# Altium PCB FPGA_interface_ver2.PcbDoc (part 2 of 2)
Units mil, origin at the board's own origin, x right, y up, seen from the top; angles counter-clockwise.
Board outline 4407 x 9659 mil, 4 copper layers (Top Layer, Ground Plane Top, Ground Plane Bottom, Bottom Layer); 18 components, 181 nets, 968 pads, 2724 vias.
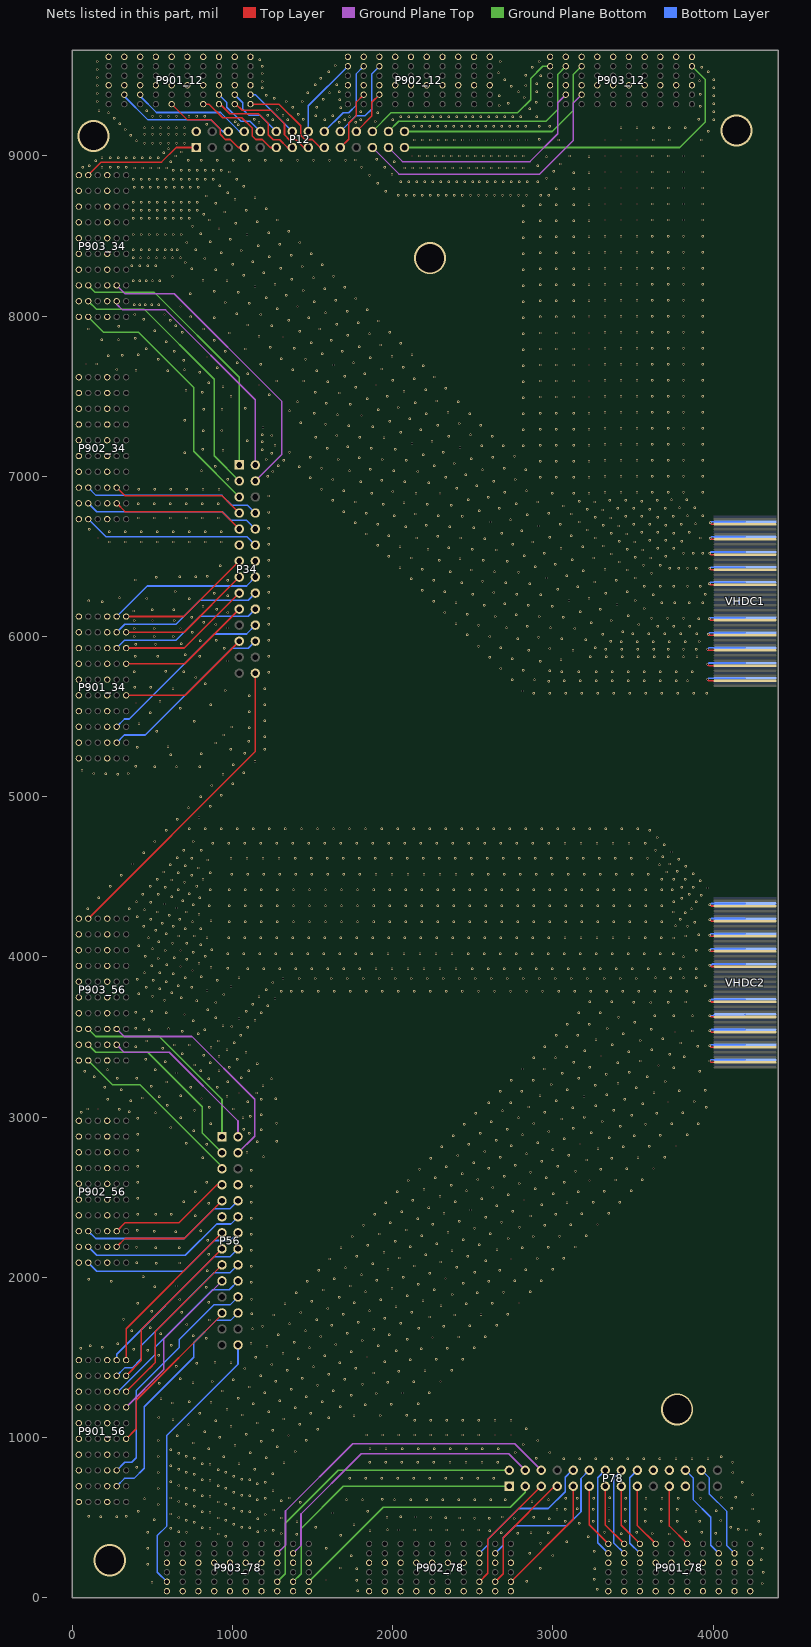
[diagram p4: the nets of this part, all layers, seen from the top]

## Via types
v1: diameter 15, hole 10, Top Layer to Bottom Layer, 2719 vias
v2: diameter 200, hole 177, Top Layer to Bottom Layer, 5 vias

## Nets (pads, with @x,y where several pads share a name; then routed paths per layer and width w, separated by ;. In a path a pad name is that pad's centre, name@x,y a point inside that pad or via, vN(x,y) a via of type N, cw(c..) or ccw(c..) an arc to the next point about the centre after c; other vN are vias at no path point) (continued)
GND: P12.15 P34.6 P34.21 P56.6 P56.18 P78.12 P78.24 P78.25 P901_12.BG1 P901_12.BG2 P901_12.BG3 P901_12.BG4 P901_12.BG5 P901_12.BG6 P901_12.BG7 P901_12.BG8 P901_12.BG9 P901_12.BG10 P901_12.DG1 P901_12.DG2 P901_12.DG3 P901_12.DG4 P901_12.DG5 P901_12.DG6 P901_12.DG7 P901_12.DG8 P901_12.DG9 P901_12.DG10 P901_34.BG1 P901_34.BG2 P901_34.BG3 P901_34.BG4 P901_34.BG5 P901_34.BG6 P901_34.BG7 P901_34.BG8 P901_34.BG9 P901_34.BG10 P901_34.DG1 P901_34.DG2 P901_34.DG3 P901_34.DG4 P901_34.DG5 P901_34.DG6 P901_34.DG7 P901_34.DG8 P901_34.DG9 P901_34.DG10 P901_56.BG1 P901_56.BG2 P901_56.BG3 P901_56.BG4 P901_56.BG5 P901_56.BG6 P901_56.BG7 P901_56.BG8 P901_56.BG9 P901_56.BG10 P901_56.DG1 P901_56.DG2 P901_56.DG3 P901_56.DG4 P901_56.DG5 P901_56.DG6 P901_56.DG7 P901_56.DG8 P901_56.DG9 P901_56.DG10 P901_78.BG1 P901_78.BG2 P901_78.BG3 P901_78.BG4 P901_78.BG5 P901_78.BG6 P901_78.BG7 P901_78.BG8 P901_78.BG9 P901_78.BG10 P901_78.DG1 P901_78.DG2 P901_78.DG3 P901_78.DG4 P901_78.DG5 P901_78.DG6 P901_78.DG7 P901_78.DG8 P901_78.DG9 P901_78.DG10 P902_12.BG1 P902_12.BG2 P902_12.BG3 P902_12.BG4 P902_12.BG5 P902_12.BG6 P902_12.BG7 P902_12.BG8 P902_12.BG9 P902_12.BG10 P902_12.DG1 P902_12.DG2 P902_12.DG3 P902_12.DG4 P902_12.DG5 P902_12.DG6 P902_12.DG7 P902_12.DG8 P902_12.DG9 P902_12.DG10 P902_34.BG1 P902_34.BG2 P902_34.BG3 P902_34.BG4 P902_34.BG5 P902_34.BG6 P902_34.BG7 P902_34.BG8 P902_34.BG9 P902_34.BG10 P902_34.DG1 P902_34.DG2 P902_34.DG3 P902_34.DG4 P902_34.DG5 P902_34.DG6 P902_34.DG7 P902_34.DG8 P902_34.DG9 P902_34.DG10 P902_56.BG1 P902_56.BG2 P902_56.BG3 P902_56.BG4 P902_56.BG5 P902_56.BG6 P902_56.BG7 P902_56.BG8 P902_56.BG9 P902_56.BG10 P902_56.DG1 P902_56.DG2 P902_56.DG3 P902_56.DG4 P902_56.DG5 P902_56.DG6 P902_56.DG7 P902_56.DG8 P902_56.DG9 P902_56.DG10 P902_78.BG1 P902_78.BG2 P902_78.BG3 P902_78.BG4 P902_78.BG5 P902_78.BG6 P902_78.BG7 P902_78.BG8 P902_78.BG9 P902_78.BG10 P902_78.DG1 P902_78.DG2 P902_78.DG3 P902_78.DG4 P902_78.DG5 P902_78.DG6 P902_78.DG7 P902_78.DG8 P902_78.DG9 P902_78.DG10 P903_12.BG1 P903_12.BG2 P903_12.BG3 P903_12.BG4 P903_12.BG5 P903_12.BG6 P903_12.BG7 P903_12.BG8 P903_12.BG9 P903_12.BG10 P903_12.DG1 P903_12.DG2 P903_12.DG3 P903_12.DG4 P903_12.DG5 P903_12.DG6 P903_12.DG7 P903_12.DG8 P903_12.DG9 P903_12.DG10 P903_34.BG1 P903_34.BG2 P903_34.BG3 P903_34.BG4 P903_34.BG5 P903_34.BG6 P903_34.BG7 P903_34.BG8 P903_34.BG9 P903_34.BG10 P903_34.DG1 P903_34.DG2 P903_34.DG3 P903_34.DG4 P903_34.DG5 P903_34.DG6 P903_34.DG7 P903_34.DG8 P903_34.DG9 P903_34.DG10 P903_56.BG1 P903_56.BG2 P903_56.BG3 P903_56.BG4 P903_56.BG5 P903_56.BG6 P903_56.BG7 P903_56.BG8 P903_56.BG9 P903_56.BG10 P903_56.DG1 P903_56.DG2 P903_56.DG3 P903_56.DG4 P903_56.DG5 P903_56.DG6 P903_56.DG7 P903_56.DG8 P903_56.DG9 P903_56.DG10 P903_78.BG1 P903_78.BG2 P903_78.BG3 P903_78.BG4 P903_78.BG5 P903_78.BG6 P903_78.BG7 P903_78.BG8 P903_78.BG9 P903_78.BG10 P903_78.DG1 P903_78.DG2 P903_78.DG3 P903_78.DG4 P903_78.DG5 P903_78.DG6 P903_78.DG7 P903_78.DG8 P903_78.DG9 P903_78.DG10 VHDC1.A2 VHDC1.A5 VHDC1.A8 VHDC1.A11 VHDC1.A14 VHDC1.A21 VHDC1.A24 VHDC1.A27 VHDC1.A30 VHDC1.A33 VHDC1.B2 VHDC1.B5 VHDC1.B8 VHDC1.B11 VHDC1.B14 VHDC1.B21 VHDC1.B24 VHDC1.B27 VHDC1.B30 VHDC1.B33 VHDC2.A2 VHDC2.A5 VHDC2.A8 VHDC2.A11 VHDC2.A14 VHDC2.A21 VHDC2.A24 VHDC2.A27 VHDC2.A30 VHDC2.A33 VHDC2.B2 VHDC2.B5 VHDC2.B8 VHDC2.B11 VHDC2.B14 VHDC2.B21 VHDC2.B24 VHDC2.B27 VHDC2.B30 VHDC2.B33 | length 9062.5
  Top Layer w10: v1(3965,5732) 3972.88,5724.12 VHDC1.A33@4200,5724.12 ; v1(3965,5827) 3973.39,5818.61 VHDC1.A30@4200,5818.61 ; v1(3965,5920) 3971.9,5913.1 VHDC1.A27@4200,5913.1 ; v1(3969,6015) 3976.41,6007.59 VHDC1.A24@4200,6007.59 ; v1(3975,6110) 3982.92,6102.08 VHDC1.A21@4200,6102.08 ; v1(3976,6329) 3982.45,6322.55 VHDC1.A14@4200,6322.55 ; v1(3978,6520) 3986.47,6511.53 VHDC1.A8@4200,6511.53 ; v1(3979,6425) 3986.96,6417.04 VHDC1.A11@4200,6417.04 ; v1(3980,3350) 3988.39,3341.61 VHDC2.A33@4200,3341.61 ; v1(3980,3444) 3987.9,3436.1 VHDC2.A30@4200,3436.1 ; v1(3980,3538) 3987.41,3530.59 VHDC2.A27@4200,3530.59 ; v1(3980,3633) 3987.92,3625.08 VHDC2.A24@4200,3625.08 ; v1(3980,3726) 3987.92,3718.08 VHDC2.A21@4200,3718.08 ; v1(3980,3948) 3987.96,3940.04 VHDC2.A14@4200,3940.04 ; v1(3980,4042) 3987.47,4034.53 VHDC2.A11@4200,4034.53 ; v1(3980,4136) 3986.98,4129.02 VHDC2.A8@4200,4129.02 ; v1(3980,4231) 3987.5,4223.5 VHDC2.A5@4200,4223.5 ; v1(3980,4325) 3987.5,4317.5 VHDC2.A2@4200,4317.5 ; v1(3981,6614) 3988.98,6606.02 VHDC1.A5@4200,6606.02 ; v1(3981,6710) 3990.5,6700.5 VHDC1.A2@4200,6700.5
  Bottom Layer w10: v1(3965,5732) 3972.87,5739.87 VHDC1.B33@4200,5739.87 ; v1(3965,5827) 3972.36,5834.36 VHDC1.B30@4200,5834.36 ; v1(3965,5920) 3973.85,5928.85 VHDC1.B27@4200,5928.85 ; v1(3969,6015) 3977.34,6023.34 VHDC1.B24@4200,6023.34 ; v1(3975,6110) 3982.83,6117.83 VHDC1.B21@4200,6117.83 ; v1(3976,6329) 3985.3,6338.3 VHDC1.B14@4200,6338.3 ; v1(3978,6520) 3985.28,6527.28 VHDC1.B8@4200,6527.28 ; v1(3979,6425) 3986.79,6432.79 VHDC1.B11@4200,6432.79 ; v1(3980,3350) 3987.36,3357.36 VHDC2.B33@4200,3357.36 ; v1(3980,3444) 3987.85,3451.85 VHDC2.B30@4200,3451.85 ; v1(3980,3538) 3988.34,3546.34 VHDC2.B27@4200,3546.34 ; v1(3980,3633) 4192.17,3633 VHDC2.B24@4200,3640.83 ; v1(3980,3726) 3987.83,3733.83 VHDC2.B21@4200,3733.83 ; v1(3980,3948) 3987.49,3948 3995.28,3955.79 VHDC2.B14@4200,3955.79 ; v1(3980,4042) 3988.28,4050.28 VHDC2.B11@4200,4050.28 ; v1(3980,4136) 3988.76,4144.76 VHDC2.B8@4200,4144.76 ; v1(3980,4231) 3988.25,4239.25 VHDC2.B5@4200,4239.25 ; v1(3980,4325) 3988.25,4333.25 VHDC2.B2@4200,4333.25 ; v1(3981,6614) 3988.76,6621.76 VHDC1.B5@4200,6621.76 ; v1(3981,6710) 3987.25,6716.25 VHDC1.B2@4200,6716.25
  other v1: 1782,42 3276,52 4307,88 497,95 2837,102 1775,109 1583,110 3259,115 4312,158 3262,179 1776,181 2921,182 1672,185 471,207 4300,235 1741,261 2998,263 2856,277 3258,289 471,307 1585,309 4306,309 2922,339 3087,348 3220,380 958,383 1676,388 4295,395 1401,396 910,397 3725,397 3427,398 1303,400 3620,400 2779,402 4016,402 2676,405 2863,405 2970,406 471,407 712,408 3322,409 3522,409 3928,409 664,410 3829,410 1158,411 1858,417 2605,417 1204,419 1255,420 2036,422 2136,422 2236,422 2336,422 2436,422 2536,422 4208,422 1967,423 4157,426 615,433 859,433 811,436 1106,436 4110,438 1057,439 1519,439 1758,454 1007,457 3165,465 761,470 1402,474 3077,476 3251,476 3451,476 3577,476 3677,476 3777,476 3917,476 4284,476 3350,480 4047,481 711,482 958,483 511,485 1158,491 2977,493 2758,494 2603,495 2510,496 910,497 1303,497 2417,497 2331,499 665,500 2238,500 1964,502 2880,502 2142,503 2684,503 178,504 2049,504 276,505 102,507 336,507 1204,519 615,522 1624,528 859,533 811,536 1106,536 1845,538 411,539 1057,539 3893,540 4020,541 1256,547 3025,552 3077,552 3251,552 3451,552 3577,552 3677,552 3777,552 4248,553 3152,554 3350,556 1007,557 4117,558 761,570 537,581 711,582 958,583 1422,595 910,597 2869,598 665,600 1304,605 1155,611 2972,611 1711,612 1811,612 2011,612 2111,612 2211,612 2311,612 2411,612 2511,612 2611,612 2702,612 1935,615 450,616 1204,619 3081,620 3255,620 3455,620 3581,620 3681,620 3781,620 3921,620 3152,621 615,622 1353,622 3354,624 4051,625 4142,627 859,633 811,636 1106,636 1057,639 4246,643 1007,657 1252,668 761,670 537,681 711,682 958,683 910,697 665,700 1155,711 1204,719 4181,720 615,722 859,733 811,736 1106,736 1057,739 1731,745 1831,745 1931,745 2031,745 2131,745 2231,745 2331,745 2431,745 2531,745 2631,745 1007,757 761,770 1251,772 537,781 4123,781 711,782 958,783 910,797 665,800 1139,802 401,813 615,822 859,833 1040,835 811,836 1321,842 1857,844 1957,844 2057,844 2157,844 2257,844 2357,844 2457,844 2557,844 2655,845 4121,846 3068,867 3168,867 3268,867 3368,867 3468,867 3568,867 3668,867 3768,867 3868,867 3968,867 2896,869 761,870 1209,872 4050,879 945,880 537,881 711,882 665,900 1110,905 2765,906 2979,906 1391,912 615,922 850,930 1858,930 1958,930 2058,930 2158,930 2258,930 2358,930 2458,930 2558,930 2658,930 1279,942 1015,950 2815,956 755,965 1180,975 537,981 2904,981 1461,982 920,1000 655,1010 1349,1012 1838,1015 1938,1015 2038,1015 2138,1015 2238,1015 2338,1015 2438,1015 2538,1015 2638,1015 2738,1015 1085,1020 825,1035 1250,1045 1531,1052 2834,1054 990,1070 725,1080 1419,1082 1155,1090 895,1105 2138,1107 2238,1107 2338,1107 2438,1107 2538,1107 2638,1107 2738,1107 628,1110 1320,1115 1601,1122 539,1124 1758,1134 1921,1137 2088,1139 1060,1140 795,1150 1489,1152 1225,1160 965,1175 1390,1185 1671,1192 1828,1204 1991,1207 2158,1209 1130,1210 624,1215 865,1220 1559,1222 730,1223 1295,1230 553,1242 1035,1245 1460,1255 1741,1262 1898,1274 2061,1277 2228,1279 1200,1280 935,1290 1629,1292 1365,1300 1105,1315 1530,1325 1811,1332 543,1337 753,1340 1968,1344 2131,1347 874,1349 2298,1349 1270,1350 1005,1360 1699,1362 673,1365 1435,1370 1175,1385 1600,1395 1881,1402 2038,1414 2201,1417 2368,1419 1340,1420 1075,1430 1769,1432 1505,1440 648,1443 1245,1455 777,1463 990,1465 1670,1465 890,1469 1951,1472 2108,1484 2271,1487 2438,1489 1410,1490 1145,1500 1839,1502 1575,1510 539,1512 1315,1525 1740,1535 2021,1542 471,1545 382,1550 2178,1554 51,1556 2341,1557 2508,1559 1480,1560 187,1562 1215,1570 112,1571 1909,1572 618,1575 1645,1580 282,1584 1115,1587 1385,1595 1810,1605 2091,1612 835,1618 2248,1624 2411,1627 2578,1629 1550,1630 755,1634 1285,1640 1979,1642 551,1648 1715,1650 1455,1665 371,1666 1880,1675 1124,1679 2161,1682 487,1685 1187,1694 2318,1694 2481,1697 2648,1699 1620,1700 714,1705 1355,1710 2049,1712 1785,1720 854,1733 1525,1735 319,1738 1950,1745 2231,1752 1257,1764 2388,1764 2551,1767 2718,1769 1690,1770 1120,1772 1425,1780 683,1782 2119,1782 495,1788 1855,1790 1595,1805 2020,1815 2301,1822 1327,1834 2458,1834 2621,1837 408,1838 2788,1839 1760,1840 850,1844 1495,1850 2189,1852 1925,1860 669,1861 1118,1862 1665,1875 2090,1885 2371,1892 1397,1904 2528,1904 2691,1907 2858,1909 1830,1910 1565,1920 2259,1922 1995,1930 835,1938 515,1941 650,1945 1735,1945 2160,1955 2441,1962 1116,1969 1467,1974 2598,1974 243,1975 2761,1977 2928,1979 1900,1980 101,1988 1635,1990 2329,1992 2065,2000 441,2002 1805,2015 2230,2025 2511,2032 842,2041 1537,2044 2668,2044 2831,2047 2998,2049 1970,2050 1705,2060 2399,2062 1116,2069 2135,2070 1875,2085 524,2088 671,2089 401,2091 2300,2095 2581,2102 1607,2114 2738,2114 2901,2117 3068,2119 2040,2120 1775,2130 2469,2132 2205,2140 850,2144 1945,2155 2370,2165 1116,2169 2651,2172 667,2183 521,2184 1677,2184 2808,2184 2971,2187 400,2188 3138,2189 2110,2190 1845,2200 2539,2202 2275,2210 2015,2225 845,2232 2440,2235 2721,2242 1747,2254 2878,2254 3041,2257 3208,2259 2180,2260 1116,2269 1915,2270 2609,2272 2345,2280 644,2283 510,2286 800,2290 404,2293 2085,2295 2510,2305 2791,2312 1817,2324 2948,2324 3111,2327 3278,2329 2250,2330 1985,2340 2679,2342 2415,2350 2155,2365 1116,2369 2580,2375 2861,2382 768,2385 409,2392 520,2394 616,2394 1887,2394 3018,2394 3181,2397 3348,2399 2320,2400 2055,2410 2749,2412 2485,2420 2225,2435 2650,2445 2931,2452 851,2463 1957,2464 3088,2464 3251,2467 1116,2469 3418,2469 2390,2470 695,2472 2125,2480 2819,2482 2555,2490 409,2492 2295,2505 2720,2515 3001,2522 768,2534 2027,2534 3158,2534 3321,2537 3488,2539 2460,2540 2195,2550 2889,2552 2625,2560 1116,2569 2365,2575 2790,2585 409,2592 3071,2592 839,2594 2097,2604 3228,2604 3391,2607 3558,2609 2530,2610 2265,2620 2959,2622 2695,2630 2435,2645 2860,2655 3141,2662 1116,2669 2167,2674 3298,2674 3461,2677 3628,2679 2600,2680 2335,2690 409,2692 3029,2692 2765,2700 2505,2715 2930,2725 3211,2732 2237,2744 3368,2744 813,2746 3531,2747 3698,2749 2670,2750 1193,2752 2405,2760 3099,2762 2835,2770 1090,2780 2575,2785 409,2792 3000,2795 3281,2802 2307,2814 3438,2814 3601,2817 3768,2819 2740,2820 2475,2830 839,2831 3169,2832 710,2836 2905,2840 1155,2845 1275,2850 2645,2855 3070,2865 3351,2872 2377,2884 3508,2884 3671,2887 3838,2889 2810,2890 409,2892 1105,2900 2545,2900 3239,2902 2975,2910 757,2914 1180,2920 1070,2925 2715,2925 3126,2930 614,2935 3421,2942 2447,2954 3578,2954 3741,2957 863,2958 3908,2959 2880,2960 1274,2961 2615,2970 3309,2972 3054,2988 409,2992 677,2995 1065,2995 2785,2995 3196,3000 1110,3005 3491,3012 1180,3015 2517,3024 3648,3024 3811,3027 519,3028 56,3030 2950,3031 356,3033 2685,3040 3379,3042 762,3043 292,3048 96,3050 160,3050 1005,3050 3124,3058 3956,3060 855,3061 2849,3063 3266,3070 593,3073 3561,3082 2600,3090 2736,3090 3718,3094 1095,3095 3881,3097 3020,3101 363,3102 220,3110 1180,3110 3449,3112 1270,3113 806,3116 436,3119 543,3127 3194,3128 965,3130 676,3133 2919,3133 3336,3140 1040,3150 1150,3150 3631,3152 2670,3160 2806,3160 3788,3164 3951,3167 304,3170 3090,3171 3519,3182 203,3185 739,3185 905,3185 491,3192 1190,3195 3264,3198 2989,3203 3406,3210 590,3219 970,3220 3701,3222 2740,3230 2876,3230 1243,3239 850,3240 3160,3241 401,3242 280,3243 1055,3245 137,3251 3589,3252 3334,3268 3059,3273 650,3275 3476,3280 76,3287 3917,3287 800,3290 915,3290 1100,3290 219,3295 518,3296 2810,3300 2946,3300 3755,3309 980,3310 3230,3311 3659,3322 765,3325 1153,3334 3404,3338 860,3340 3129,3343 580,3345 3546,3350 457,3360 1030,3360 2880,3370 3016,3370 3820,3376 915,3380 3300,3381 820,3385 3729,3392 685,3395 1084,3405 3474,3408 3199,3413 965,3420 3616,3420 565,3430 865,3435 395,3440 2950,3440 3086,3440 3905,3442 635,3450 730,3450 3370,3451 3799,3462 1010,3465 465,3475 910,3475 3544,3478 3269,3483 3686,3490 1050,3510 3020,3510 3156,3510 785,3520 3440,3521 3762,3531 685,3535 3869,3537 480,3545 825,3545 3614,3548 600,3550 3339,3553 395,3555 1095,3560 995,3565 940,3570 3090,3580 3226,3580 3510,3591 755,3600 1140,3605 445,3610 1040,3615 895,3620 3409,3623 3753,3632 3635,3633 3871,3633 700,3640 585,3650 1180,3650 3160,3650 3296,3650 395,3655 495,3660 1085,3660 845,3670 1220,3695 1125,3705 895,3715 3611,3715 3505,3717 3719,3717 3829,3718 3230,3720 3366,3720 775,3725 575,3730 1265,3740 680,3745 1165,3750 500,3755 945,3765 415,3770 620,3775 1305,3785 1365,3785 1435,3785 1535,3785 1635,3785 1735,3785 1835,3785 1935,3785 2035,3785 2135,3785 2235,3785 2335,3785 2435,3785 2535,3785 2635,3785 2735,3785 2835,3785 2935,3785 3035,3785 3135,3785 3235,3785 3335,3785 3435,3785 3535,3785 3635,3785 3735,3785 3835,3785 840,3790 1210,3795 545,3800 460,3810 745,3810 990,3815 660,3820 3950,3820 1250,3840 585,3845 505,3855 905,3855 405,3860 1315,3865 1415,3865 1515,3865 1615,3865 1715,3865 1815,3865 1915,3865 2015,3865 2115,3865 2215,3865 2315,3865 2415,3865 2515,3865 2615,3865 2715,3865 2815,3865 2915,3865 3015,3865 3115,3865 3215,3865 3320,3865 3420,3865 3520,3865 705,3870 1040,3870 3640,3870 3735,3870 3815,3870 3895,3870 805,3875 630,3895 450,3900 545,3900 750,3915 1095,3925 1195,3925 1295,3925 1395,3925 1495,3925 1595,3925 1695,3925 1795,3925 1895,3925 1995,3925 2095,3925 2195,3925 2295,3925 2395,3925 2495,3925 2595,3925 2695,3925 2795,3925 2895,3925 2995,3925 3095,3925 3195,3925 3295,3925 3395,3925 3495,3925 3595,3925 3695,3925 3795,3925 3895,3925 970,3930 865,3935 675,3940 495,3945 590,3950 790,3960 715,3985 535,3990 635,3995 3815,4000 455,4005 830,4005 970,4020 1070,4020 1170,4020 1270,4020 1370,4020 1470,4020 1570,4020 1670,4020 1770,4020 1870,4020 1970,4020 2070,4020 2170,4020 2270,4020 2370,4020 2470,4020 2570,4020 2670,4020 2770,4020 2870,4020 2970,4020 3070,4020 3170,4020 3270,4020 3370,4020 3470,4020 3570,4020 3670,4020 3750,4020 755,4030 580,4040 675,4040 3895,4042 870,4045 500,4050 415,4070 800,4075 625,4085 715,4085 540,4095 3755,4118 475,4120 840,4120 975,4120 1075,4120 1175,4120 1275,4120 1375,4120 1475,4120 1575,4120 1675,4120 1775,4120 1875,4120 1975,4120 2075,4120 2175,4120 2275,4120 2375,4120 2475,4120 2575,4120 2675,4120 2775,4120 2875,4120 2975,4120 3075,4120 3175,4120 3275,4120 3375,4120 3475,4120 3575,4120 3675,4120 665,4130 760,4130 3830,4130 3911,4137 585,4145 520,4165 705,4175 800,4175 445,4190 630,4190 3840,4190 3765,4195 560,4210 3885,4215 750,4220 980,4220 1080,4220 1180,4220 1280,4220 1380,4220 1480,4220 1580,4220 1680,4220 1780,4220 1880,4220 1980,4220 2080,4220 2180,4220 2280,4220 2380,4220 2480,4220 2580,4220 2680,4220 2780,4220 2880,4220 2980,4220 3080,4220 3180,4220 3280,4220 3380,4220 3480,4220 3580,4220 3680,4220 865,4225 490,4235 670,4235 3795,4235 405,4250 605,4260 790,4265 3825,4275 530,4280 710,4280 3750,4280 450,4295 95,4300 355,4300 3865,4300 650,4305 855,4320 980,4320 1080,4320 1180,4320 1280,4320 1380,4320 1480,4320 1580,4320 1680,4320 1780,4320 1880,4320 1980,4320 2080,4320 2180,4320 2280,4320 2380,4320 2480,4320 2580,4320 2680,4320 2780,4320 2880,4320 2980,4320 3080,4320 3180,4320 3280,4320 3380,4320 3480,4320 3580,4320 3680,4320 755,4325 575,4330 490,4340 400,4345 3755,4345 3895,4345 690,4350 3805,4365 165,4370 795,4370 620,4375 3925,4385 440,4390 535,4390 3850,4390 730,4395 660,4420 860,4420 980,4420 1080,4420 1180,4420 1280,4420 1380,4420 1480,4420 1580,4420 1680,4420 1780,4420 1880,4420 1980,4420 2080,4420 2180,4420 2280,4420 2380,4420 2480,4420 2580,4420 2680,4420 2780,4420 2880,4420 2980,4420 3080,4420 3180,4420 3280,4420 3380,4420 3480,4420 3580,4420 3680,4420 3745,4420 3965,4430 580,4435 3805,4435 3875,4435 235,4440 485,4440 775,4440 700,4465 3920,4475 620,4480 530,4485 815,4485 3680,4485 3755,4485 3825,4485 305,4510 745,4510 995,4515 1095,4515 1195,4515 1295,4515 1395,4515 1495,4515 1595,4515 1695,4515 1795,4515 1895,4515 1995,4515 2095,4515 2195,4515 2295,4515 2395,4515 2495,4515 2595,4515 2695,4515 2795,4515 2895,4515 2995,4515 3095,4515 3195,4515 3295,4515 3395,4515 3495,4515 3595,4515 3875,4520 660,4525 860,4525 570,4530 3710,4530 3775,4535 785,4555 3830,4565 705,4570 610,4575 3665,4575 375,4580 3730,4580 845,4605 3785,4610 745,4615 990,4615 1090,4615 1190,4615 1290,4615 1390,4615 1490,4615 1590,4615 1690,4615 1790,4615 1890,4615 1990,4615 2090,4615 2190,4615 2290,4615 2390,4615 2490,4615 2590,4615 2690,4615 2790,4615 2890,4615 2990,4615 3090,4615 3190,4615 3290,4615 3390,4615 3490,4615 3590,4615 655,4620 3685,4625 445,4650 3740,4655 695,4665 805,4665 3640,4665 3695,4700 875,4710 975,4710 1075,4710 1175,4710 1275,4710 1375,4710 1475,4710 1575,4710 1675,4710 1775,4710 1875,4710 1975,4710 2075,4710 2175,4710 2275,4710 2375,4710 2475,4710 2575,4710 2675,4710 2775,4710 2875,4710 2975,4710 3075,4710 3175,4710 3275,4710 3375,4710 3475,4710 3575,4710 515,4720 755,4720 3650,4745 585,4790 3605,4790 730,4800 830,4800 930,4800 1030,4800 1130,4800 1230,4800 1330,4800 1430,4800 1530,4800 1630,4800 1730,4800 1830,4800 1930,4800 2030,4800 2130,4800 2230,4800 2330,4800 2430,4800 2530,4800 2630,4800 2730,4800 2830,4800 2930,4800 3030,4800 3130,4800 3230,4800 3330,4800 3430,4800 3530,4800 655,4860 790,4870 725,4930 860,4940 800,5000 930,5010 870,5070 1000,5080 940,5140 284,5141 208,5143 134,5145 348,5145 1070,5150 60,5165 650,5186 794,5186 513,5188 396,5190 1005,5200 1140,5220 613,5262 805,5268 1075,5270 1200,5295 989,5296 405,5308 597,5311 895,5335 1100,5345 1200,5375 945,5385 526,5409 1105,5430 995,5435 416,5456 760,5470 1200,5475 485,5523 1105,5530 673,5551 864,5575 1200,5575 397,5585 547,5595 1105,5630 2880,5645 2980,5645 3080,5645 3180,5645 3280,5645 3380,5645 3480,5645 3580,5645 3680,5645 3780,5645 3880,5645 3960,5645 2810,5660 955,5663 628,5675 1200,5675 390,5682 489,5684 829,5704 2975,5720 3070,5725 3170,5725 3270,5725 3370,5725 3470,5725 3570,5725 3670,5725 3770,5725 3840,5725 2745,5730 2885,5730 770,5744 1226,5777 386,5779 695,5780 3055,5780 3160,5780 3270,5780 3370,5780 3470,5780 3570,5780 3670,5780 3770,5780 3870,5780 583,5782 2980,5785 2815,5790 2675,5800 2920,5845 968,5847 3050,5855 2745,5860 2605,5870 3719,5873 3815,5873 3899,5873 3233,5874 3333,5874 3433,5874 3533,5874 3633,5874 1226,5877 393,5878 533,5878 796,5878 705,5885 2850,5915 3125,5915 3330,5920 3430,5920 3530,5920 3630,5920 3720,5920 3815,5920 3895,5920 2980,5925 948,5926 2675,5930 3265,5930 2535,5940 396,5951 519,5951 680,5955 3427,5968 3527,5968 3627,5968 3727,5968 3827,5968 3913,5969 3360,5970 797,5974 898,5977 1226,5977 3205,5980 2780,5985 3055,5985 2910,5995 385,6000 510,6000 630,6000 2605,6000 2465,6010 3310,6015 3498,6016 3598,6016 3698,6016 3798,6016 3898,6016 747,6027 3435,6030 385,6050 510,6050 675,6050 3135,6050 968,6053 2710,6055 2985,6055 3655,6063 3755,6063 3855,6063 2840,6065 2535,6070 895,6075 3535,6075 1226,6077 2395,6080 3240,6085 820,6090 385,6100 500,6100 635,6100 3365,6100 3910,6110 3615,6115 3715,6115 3815,6115 745,6120 3065,6120 2640,6125 2915,6125 3470,6130 2770,6135 2465,6140 970,6150 2325,6150 3170,6155 384,6159 499,6166 633,6168 900,6170 3295,6170 3570,6175 1226,6177 815,6190 2995,6190 2570,6195 2845,6195 3400,6200 2700,6205 2395,6210 3680,6210 3760,6210 3850,6210 3935,6210 187,6218 2255,6220 103,6222 3100,6225 3515,6225 730,6236 463,6237 3225,6240 294,6241 970,6255 2925,6260 3625,6260 2500,6265 2775,6265 3950,6265 885,6270 3330,6270 2630,6275 1226,6277 2325,6280 3465,6280 642,6281 2185,6290 3030,6295 3155,6310 3570,6315 3670,6315 3755,6315 3840,6315 3920,6315 2855,6330 2430,6335 2705,6335 3260,6340 2560,6345 970,6350 2255,6350 3395,6350 393,6353 2115,6360 2960,6365 3515,6365 523,6371 769,6372 669,6374 843,6375 1226,6377 3085,6380 3615,6395 2785,6400 2360,6405 2635,6405 3190,6410 2490,6415 3465,6415 2185,6420 3325,6420 3730,6425 3785,6425 3840,6425 3895,6425 2045,6430 2890,6435 923,6441 3565,6445 3670,6445 3015,6450 3415,6465 2715,6470 2290,6475 2565,6475 1226,6477 3120,6480 2420,6485 2115,6490 3255,6490 3610,6490 3515,6495 1975,6500 3705,6500 2820,6505 3365,6515 2945,6520 3815,6520 3875,6520 3935,6520 2645,6540 3560,6540 2220,6545 2495,6545 3465,6545 3050,6550 3655,6550 3755,6550 2350,6555 2045,6560 3185,6560 3315,6565 1905,6570 2750,6575 1226,6577 230,6590 330,6590 430,6590 530,6590 630,6590 730,6590 830,6590 930,6590 2875,6590 3510,6590 3415,6595 3805,6595 3605,6600 3705,6600 2575,6610 160,6615 2150,6615 2425,6615 3265,6615 3920,6615 2980,6620 2280,6625 1975,6630 3115,6630 1835,6640 3460,6640 2680,6645 3365,6645 3755,6645 3555,6650 3655,6650 3850,6650 230,6655 330,6655 430,6655 530,6655 630,6655 730,6655 830,6655 930,6655 2805,6660 3215,6665 105,6670 1226,6677 2505,6680 2080,6685 2355,6685 2910,6690 3410,6690 2210,6695 3315,6695 3705,6695 1905,6700 3045,6700 3505,6700 3605,6700 3800,6700 3890,6705 1765,6710 2610,6715 3165,6715 2735,6730 410,6740 510,6740 610,6740 710,6740 810,6740 910,6740 3360,6740 3265,6745 3655,6745 2435,6750 3455,6750 3555,6750 3750,6750 2010,6755 2285,6755 3840,6755 3935,6755 2840,6760 2140,6765 3115,6765 1835,6770 2975,6770 1226,6777 1695,6780 2540,6785 3310,6790 3215,6795 3605,6795 2665,6800 3405,6800 3505,6800 3700,6800 3790,6805 3885,6805 3065,6815 2365,6820 1940,6825 2215,6825 410,6830 510,6830 610,6830 710,6830 810,6830 910,6830 2770,6830 2070,6835 1765,6840 2905,6840 3260,6840 3165,6845 3555,6845 1625,6850 3355,6850 3455,6850 3650,6850 2470,6855 3740,6855 3835,6855 2595,6870 1226,6877 2295,6890 1870,6895 2145,6895 2995,6895 3130,6895 3225,6895 2700,6900 3325,6900 3425,6900 3525,6900 3620,6900 3720,6900 3815,6900 3935,6900 2000,6905 1695,6910 2835,6910 415,6920 515,6920 615,6920 715,6920 815,6920 915,6920 1555,6920 2400,6925 2525,6940 2225,6960 1800,6965 2075,6965 2630,6970 1930,6975 1625,6980 2765,6980 971,6983 1485,6990 2330,6995 2920,6995 3020,6995 3130,6995 3225,6995 1220,7000 3325,7000 3425,7000 3525,7000 3620,7000 3720,7000 3815,7000 3935,7000 2455,7010 1250,7030 2155,7030 806,7034 1730,7035 2005,7035 2560,7040 2830,7040 1860,7045 1555,7050 2695,7050 1415,7060 891,7063 1285,7065 2260,7065 2385,7080 2920,7095 3020,7095 3130,7095 3225,7095 1320,7100 2085,7100 3325,7100 3425,7100 3525,7100 3620,7100 3720,7100 3815,7100 3935,7100 1210,7105 1660,7105 1935,7105 2490,7110 1790,7115 1485,7120 2625,7120 2760,7125 2190,7135 1245,7145 701,7148 1355,7150 2315,7150 940,7162 1185,7165 813,7170 2015,7170 1590,7175 1865,7175 2420,7180 1720,7185 2555,7190 2690,7190 2815,7190 1265,7195 2920,7195 3020,7195 3130,7195 3225,7195 3325,7200 3425,7200 3525,7200 3620,7200 3720,7200 3815,7200 3935,7200 2120,7205 1185,7215 2245,7220 1092,7221 1945,7240 1520,7245 1795,7245 2350,7250 2620,7250 1245,7255 1650,7255 1185,7260 2485,7260 2050,7275 816,7284 933,7286 2175,7290 2815,7290 2920,7295 3020,7295 3130,7295 3225,7295 3325,7300 3425,7300 3525,7300 3620,7300 3720,7300 3815,7300 3935,7300 1190,7305 1875,7310 1725,7315 2280,7320 2550,7320 1580,7325 2415,7330 1425,7335 1980,7345 702,7351 2105,7360 1805,7380 1655,7385 2210,7390 2480,7390 2815,7390 1510,7395 2920,7395 3020,7395 3130,7395 3225,7395 2345,7400 3325,7400 3425,7400 3525,7400 3620,7400 3720,7400 3815,7400 3935,7400 1355,7410 1910,7415 934,7418 820,7420 1080,7425 2035,7430 1735,7450 1585,7455 2140,7460 1405,7465 2410,7465 2275,7470 1840,7485 2815,7490 2920,7495 3020,7495 3130,7495 3225,7495 990,7500 1965,7500 3325,7500 3425,7500 3525,7500 3620,7500 3720,7500 3815,7500 3935,7500 1230,7510 1665,7520 1515,7525 811,7526 2070,7530 709,7538 2205,7540 2330,7550 1770,7555 940,7560 1165,7570 1895,7570 850,7585 1595,7590 2815,7590 1275,7595 1445,7595 2920,7595 3020,7595 3130,7595 3225,7595 2000,7600 3325,7600 3425,7600 3525,7600 3620,7600 3720,7600 3815,7600 3935,7600 2135,7610 2260,7620 1700,7625 1095,7640 1825,7640 795,7650 595,7660 1525,7660 397,7663 700,7665 1375,7665 276,7667 1930,7670 905,7679 2065,7680 2190,7690 2815,7690 1630,7695 2920,7695 3020,7695 3130,7695 3225,7695 1175,7700 3325,7700 3425,7700 3525,7700 3620,7700 3720,7700 3815,7700 3935,7700 85,7701 152,7701 1030,7710 1755,7710 695,7725 535,7730 1455,7730 1305,7735 1860,7740 840,7745 1995,7750 223,7754 312,7757 411,7760 2120,7760 1560,7765 635,7780 955,7780 1685,7780 2815,7790 1080,7795 2920,7795 3020,7795 3130,7795 3225,7795 461,7797 1385,7800 3325,7800 3425,7800 3525,7800 3620,7800 3720,7800 3815,7800 3935,7800 1235,7805 1790,7810 1925,7820 2050,7830 1490,7835 585,7840 885,7850 1615,7850 182,7853 288,7853 392,7863 1315,7870 1165,7875 1720,7880 1855,7890 2815,7890 980,7895 2920,7895 3020,7895 3130,7895 3225,7895 685,7900 1980,7900 3325,7900 3425,7900 3525,7900 3620,7900 3720,7900 3815,7900 3935,7900 1420,7905 515,7910 99,7920 820,7920 1545,7920 289,7937 645,7940 1245,7940 1095,7945 1650,7950 1785,7960 1910,7970 610,7975 1350,7975 445,7980 885,7990 1475,7990 2815,7990 740,7995 2920,7995 3020,7995 3130,7995 3225,7995 3325,8000 3425,8000 3525,8000 3620,8000 3720,8000 3815,8000 3935,8000 390,8010 575,8010 1175,8010 1025,8015 1580,8020 1715,8030 1840,8040 1280,8045 675,8060 1405,8060 385,8070 420,8070 455,8070 495,8070 540,8070 1105,8080 955,8085 1510,8090 2815,8090 2920,8095 3020,8095 3130,8095 3225,8095 1645,8100 3325,8100 3425,8100 3525,8100 3620,8100 3720,8100 3815,8100 3935,8100 1770,8110 1210,8115 1335,8130 735,8140 1035,8150 885,8155 1440,8160 1575,8170 1700,8180 1140,8185 2815,8190 2920,8195 3020,8195 3130,8195 3225,8195 1265,8200 3325,8200 3425,8200 3525,8200 3620,8200 3720,8200 3815,8200 3935,8200 380,8220 420,8220 460,8220 500,8220 545,8220 965,8220 815,8225 1370,8230 1505,8240 625,8250 1630,8250 1070,8255 1195,8270 895,8290 2815,8290 745,8295 2920,8295 3020,8295 3130,8295 3225,8295 1300,8300 3325,8300 3425,8300 3525,8300 3620,8300 3720,8300 3815,8300 3935,8300 1435,8310 370,8315 420,8315 470,8315 520,8315 1560,8320 1000,8325 705,8335 1125,8340 825,8360 380,8365 425,8365 475,8365 525,8365 575,8365 625,8365 675,8365 1230,8370 1365,8380 1490,8390 2815,8390 930,8395 2920,8395 3020,8395 3130,8395 3225,8395 3325,8400 3425,8400 3525,8400 3620,8400 3720,8400 3815,8400 3935,8400 1055,8410 380,8415 430,8415 480,8415 530,8415 580,8415 620,8415 655,8415 770,8415 1160,8440 1295,8450 715,8460 1420,8460 860,8465 985,8480 2815,8490 2920,8495 3020,8495 3130,8495 3225,8495 3325,8500 3425,8500 3525,8500 3620,8500 3720,8500 3815,8500 3935,8500 380,8510 430,8510 480,8510 530,8510 580,8510 630,8510 680,8510 1090,8510 800,8515 1225,8520 1350,8530 915,8550 750,8560 1020,8580 1155,8590 2815,8590 2920,8595 3020,8595 3130,8595 3225,8595 855,8600 1280,8600 3325,8600 3425,8600 3525,8600 3620,8600 3720,8600 3815,8600 3935,8600 380,8610 430,8610 480,8610 530,8610 580,8610 630,8610 680,8610 730,8610 820,8635 950,8650 380,8660 430,8660 480,8660 530,8660 580,8660 630,8660 680,8660 730,8660 780,8660 1085,8660 1210,8670 2815,8690 2920,8695 3020,8695 3130,8695 3225,8695 3325,8700 3425,8700 3525,8700 3620,8700 3720,8700 3815,8700 3935,8700 895,8705 380,8710 430,8710 480,8710 530,8710 580,8710 630,8710 680,8710 730,8710 780,8710 1015,8730 1140,8740 835,8750 2035,8755 2085,8755 2135,8755 2185,8755 2235,8755 2285,8755 2335,8755 2385,8755 2435,8755 2485,8755 2535,8755 2585,8755 2635,8755 2685,8755 2735,8755 2785,8755 2835,8755 2925,8755 2975,8755 970,8770 1955,8780 3020,8795 3130,8795 3225,8795 3325,8800 3425,8800 3525,8800 3620,8800 3720,8800 3815,8800 3935,8800 385,8805 435,8805 485,8805 535,8805 585,8805 635,8805 685,8805 735,8805 785,8805 1070,8810 920,8815 1905,8830 2050,8840 2100,8840 2150,8840 2200,8840 2250,8840 2300,8840 2350,8840 2400,8840 2450,8840 2500,8840 2540,8840 2590,8840 2640,8840 2690,8840 2740,8840 2790,8840 2840,8840 2905,8840 380,8855 430,8855 480,8855 530,8855 580,8855 630,8855 680,8855 730,8855 780,8855 830,8855 880,8855 1025,8855 2960,8860 1855,8880 1995,8885 3130,8895 3225,8895 980,8900 3325,8900 3425,8900 3525,8900 3620,8900 3720,8900 3815,8900 3935,8900 3005,8905 630,8910 680,8910 730,8910 780,8910 830,8910 880,8910 930,8910 390,8925 440,8925 490,8925 540,8925 590,8925 2075,8925 2125,8925 2175,8925 2225,8925 2275,8925 2325,8925 2375,8925 2425,8925 2475,8925 2525,8925 2565,8925 2615,8925 2665,8925 2715,8925 2765,8925 2815,8925 65,8930 185,8930 235,8930 285,8930 335,8930 1805,8930 1950,8930 105,8940 2905,8940 3045,8950 615,8965 2010,8965 145,8970 723,8973 805,8973 905,8973 1005,8973 1105,8973 1205,8973 1305,8973 1405,8973 1505,8973 1605,8973 1705,8973 1766,8975 1900,8980 185,8990 235,8990 285,8990 335,8990 385,8990 435,8990 485,8990 535,8990 2960,8995 3225,8995 645,9000 2120,9000 2165,9000 2215,9000 2265,9000 2315,9000 2365,9000 2415,9000 2465,9000 2515,9000 2565,9000 2615,9000 2665,9000 2715,9000 2765,9000 2815,9000 3105,9000 3325,9000 3425,9000 3525,9000 3620,9000 3720,9000 3815,9000 3935,9000 570,9020 680,9025 600,9045 450,9080 500,9080 550,9080 600,9080 650,9080 700,9080 400,9095 2135,9100 2185,9100 2235,9100 2285,9100 2335,9100 2385,9100 2435,9100 2485,9100 2535,9100 2585,9100 2635,9100 2685,9100 2735,9100 2785,9100 2835,9100 3035,9100 3325,9100 3425,9100 3525,9100 3625,9100 3725,9100 3925,9100 2915,9105 365,9130 450,9135 500,9135 550,9135 600,9135 650,9135 700,9135 3970,9155 330,9165 450,9175 500,9175 550,9175 600,9175 650,9175 700,9175 3425,9175 3525,9175 3625,9175 3725,9175 3825,9175 2130,9185 2180,9185 2230,9185 2280,9185 2330,9185 2380,9185 2430,9185 2480,9185 2530,9185 2580,9185 2630,9185 2680,9185 2730,9185 2780,9185 2830,9185 2915,9185 2980,9185 1036,9195 838,9197 295,9200 1165,9210 1665,9210 1770,9210 1016,9213 1890,9215 1250,9225 1345,9225 1575,9225 1700,9225 1800,9225 2000,9225 4005,9225 1134,9228 1440,9230 3910,9230 260,9235 1730,9245 2050,9245 2100,9245 2150,9245 2200,9245 2250,9245 2300,9245 2350,9245 2400,9245 2455,9245 2500,9245 2550,9245 2600,9245 2650,9245 2700,9245 2750,9245 2800,9245 2900,9245 500,9248 550,9248 600,9248 728,9248 775,9248 825,9248 650,9249 1520,9250 1625,9250 1220,9255 1315,9255 1410,9260 225,9270 1905,9270 1800,9275 4005,9275 166,9283 464,9283 1280,9290 2855,9295 1675,9300 1375,9305 1525,9305 3920,9310 2665,9315 4005,9325 2720,9330 2895,9335 155,9340 1335,9340 1435,9340 1670,9350 1565,9355 1260,9360 2820,9365 2665,9375 4005,9375 1210,9380 3920,9385 155,9390 1470,9395 1605,9395 1665,9400 2785,9400 2900,9400 1185,9425 4005,9425 2740,9435 155,9440 2830,9440 1515,9445 1650,9445 2900,9450 1185,9465 3915,9470 2700,9475 4005,9475 1550,9485 155,9490 2925,9500 2830,9505 1185,9515 2660,9520 1600,9525 3970,9525 155,9540 2870,9555 3930,9555 1185,9560 1640,9565 155,9590 2670,9590 2915,9590 1170,9600
  other v2: 233,233 3775,1175 2232,8362 132,9125 4146,9159
"MAIN 5V RAIL_12": P12.14 P903_12.D10 | length 2326.5
  Ground Plane Bottom w10: P12.14@2073,9053 3791,9053 3952,9214 3952,9475.77 P903_12.D10@3867.83,9559.94
"MAIN 5V RAIL_34": P12.1 P903_34.D10 | length 745.3
  Top Layer w10: P903_34.D10@99.06,8880.83 180.23,8962 556.56,8962 647.56,9053 P12.1@773,9053
"MAIN 5V RAIL_56": P34.28 P903_56.D10 | length 1964.2
  Top Layer w10: P903_56.D10@99.06,4238.83 1142,5281.77 P34.28@1142,5771
"MAIN 5V RAIL_78": P56.28 P903_78.D10 | length 1711.6
  Bottom Layer w10: P903_78.D10@590,99.06 530,159.06 530,387.54 590,447.54 590,1013 1034,1457 P56.28@1034,1577
MIXER_PWDN12: P12.6 P901_12.A7 | length 597.3
  Top Layer w10: P901_12.A7@816.55,9323.72 853.28,9323.72 938,9239 1058,9239 1123,9174 1123,9125 1145,9103 1185.97,9103 1235.97,9053 P12.6@1273,9053
MIXER_PWDN34: P34.10 P901_34.A7 | length 848.2
  Top Layer w10: P901_34.A7@335.28,5829.55 700.55,5829.55 P34.10@1042,6171
MIXER_PWDN56: P56.10 P901_56.A7 | length 1037.4
  Ground Plane Top w10: P901_56.A7@335.28,1187.55 571,1423.28 571,1614 P56.10@934,1977
MIXER_PWDN78: P78.9 P901_78.A7 | length 408.1
  Top Layer w10: P78.9@3527,696 3527,449.55 P901_78.A7@3641.27,335.28
NCS_ADC12: P12.4 P901_12.A5 | length 585.6
  Top Layer w10: P901_12.A5@619.7,9323.72 621.42,9322 621.42,9321.58 718,9225 867,9225 923,9169 923,9135 955,9103 985.97,9103 1035.97,9053 P12.4@1073,9053
NCS_ADC34: P34.12 P901_34.A5 | length 846.9
  Top Layer w10: P901_34.A5@335.28,5632.7 703.7,5632.7 P34.12@1042,5971
NCS_ADC56: P56.12 P901_56.A5 | length 1034.3
  Top Layer w10: P901_56.A5@335.28,990.7 399,1054.42 399,1232 934,1767 P56.12@934,1777
NCS_ADC78: P78.11 P901_78.A5 | length 406.8
  Top Layer w10: P78.11@3727,696 3727,446.4 P901_78.A5@3838.13,335.28
SW_EN1_12: P12.18 P901_12.B3 | length 751
  Bottom Layer w10: P901_12.B3@422.85,9382.78 422.85,9373.1 524.45,9271.5 924.5,9271.5 1043,9153 P12.18@1073,9153
SW_EN1_34: P34.25 P901_34.B3 | length 1128.9
  Bottom Layer w10: P901_34.B3@276.22,5435.85 325.37,5485 355,5485 885.53,6015.53 1086.53,6015.53 P34.25@1142,6071
SW_EN1_56: P56.25 P901_56.B3 | length 1491.4
  Bottom Layer w10: P901_56.B3@285.9,793.85 P901_56.B3@276.22,793.85 327.37,845 371,845 399,873 399,1293 667,1561 667,1611 883,1827 984,1827 P56.25@1034,1877
SW_EN1_78: P78.26 P901_78.B3 | length 605.9
  Bottom Layer w10: P78.26@3827,796 3875,748 3875,612 3985,502 3985,326.2 P901_78.B3@4034.98,276.22
SW_EN2_12: P12.17 P901_12.B2 | length 749.4
  Bottom Layer w10: P901_12.B2@324.43,9382.78 324.43,9373.1 472.52,9225 867,9225 939,9153 P12.17@973,9153
SW_EN2_34: P34.26 P901_34.B2 | length 1128.2
  Bottom Layer w10: P901_34.B2@276.22,5337.43 323.79,5385 455,5385 996.47,5926.47 1097.47,5926.47 P34.26@1142,5971
SW_EN2_56: P56.26 P901_56.B2 | length 1482.9
  Bottom Layer w10: P901_56.B2@276.22,695.43 324.79,744 384,744 448,808 448,1191 758,1501 758,1591 899.47,1732.47 989.47,1732.47 P56.26@1034,1777
SW_EN2_78: P78.27 P901_78.B2 | length 605.3
  Bottom Layer w10: P78.27@3927,796 3977,746 3977,646 4086,537 4086,323.62 P901_78.B2@4133.4,276.22
VCO_ADC_CLK12: P12.21 P901_12.B10 | length 356.4
  Bottom Layer w10: P901_12.B10@1111.83,9382.78 1143.22,9382.78 P12.21@1373,9153
VCO_ADC_CLK34: P34.22 P901_34.B10 | length 967.7
  Bottom Layer w10: P901_34.B10@276.22,6124.83 466.92,6315.53 1086.53,6315.53 P34.22@1142,6371
VCO_ADC_CLK56: P56.22 P901_56.B10 | length 1066.6
  Bottom Layer w10: P901_56.B10@276.22,1482.83 276.22,1519.22 884,2127 984,2127 P56.22@1034,2177
VCO_ADC_CLK78: P78.21 P901_78.B10 | length 565.6
  Bottom Layer w10: P78.21@3327,795 3280,748 3280,342.22 P901_78.B10@3346,276.22
VCO_ADC_SDI12: P12.20 P901_12.B9 | length 388
  Bottom Layer w10: P901_12.B9@1013.4,9373.1 P901_12.B9@1013.4,9382.78 1064,9332.18 1064,9292 1103,9253 1173,9253 P12.20@1273,9153
VCO_ADC_SDI34: P34.23 P901_34.B9 | length 967.1
  Bottom Layer w10: P901_34.B9@276.22,6026.4 326.82,6077 647,6077 796.47,6226.47 1097.47,6226.47 P34.23@1142,6271
VCO_ADC_SDI56: P56.23 P901_56.B9 | length 1093.3
  Bottom Layer w10: P901_56.B9@276.22,1384.4 325.82,1434 373,1434 430,1491 430,1574 885,2029 986,2029 P56.23@1034,2077
VCO_ADC_SDI78: P78.22 P901_78.B9 | length 564.4
  Bottom Layer w10: P78.22@3427,795 3380.69,748.69 3380.69,339.96 P901_78.B9@3444.42,276.22
VCO_PWDN12: P12.9 P901_12.A10 | length 608.5
  Top Layer w10: P901_12.A10@1111.83,9323.72 1290.28,9323.72 1425,9189 1425,9129 1451,9103 1497,9103 1547,9053 P12.9@1573,9053
VCO_PWDN34: P34.7 P901_34.A10 | length 850.1
  Top Layer w10: P901_34.A10@335.28,6124.83 695.83,6124.83 P34.7@1042,6471
VCO_PWDN56: P56.7 P901_56.A10 | length 1042.2
  Top Layer w10: P901_56.A10@335.28,1482.83 335.28,1678.28 P56.7@934,2277
VCO_PWDN78: P78.6 P901_78.A10 | length 410
  Top Layer w10: P78.6@3227,696 3227,454.28 P901_78.A10@3346,335.28
VCO_SDO12: P12.19 P901_12.B8 | length 379.7
  Bottom Layer w10: P901_12.B8@914.98,9373.1 P901_12.B8@914.98,9382.78 964,9333.76 964,9305 1052,9217 1109,9217 P12.19@1173,9153
VCO_SDO34: P34.24 P901_34.B8 | length 966.4
  Bottom Layer w10: P901_34.B8@276.22,5927.98 325.24,5977 647,5977 796.47,6126.47 1097.47,6126.47 P34.24@1142,6171
VCO_SDO56: P56.24 P901_56.B8 | length 1071.8
  Bottom Layer w10: P901_56.B8@276.22,1285.98 P901_56.B8@285.98,1285.98 ; P901_56.B8@286.22,1285.98 P901_56.B8@285.98,1285.98 ; P56.24@1034,1977 978.53,1921.53 874.53,1921.53 516,1563 516,1516 P901_56.B8@285.98,1285.98
VCO_SDO78: P78.23 P901_78.B8 | length 564.3
  Bottom Layer w10: P78.23@3527,795 3480,748 3480,339.07 P901_78.B8@3542.85,276.22
VGA12_A0: P12.26 P903_12.D1 | length 1355.5
  Ground Plane Bottom w10: P12.26@1873,9153 1989,9269 2779,9269 2861.21,9351.21 2861.21,9484.21 2936.94,9559.94 P903_12.D1@2982,9559.94
VGA12_A1: P12.13 P903_12.B2 | length 1430.8
  Ground Plane Top w10: P12.13@1973,9053 2061,8965 2857,8965 3030,9138 3030,9332.35 P903_12.B2@3080.43,9382.78
VGA12_A2: P12.27 P903_12.D2 | length 1404
  Ground Plane Bottom w10: P12.27@1973,9153 2037,9217 2956,9217 3031,9292 3031,9510.52 P903_12.D2@3080.43,9559.94
VGA12_A3: P12.12 P903_12.B3 | length 1717
  Ground Plane Top w10: P12.12@1873,9053 2039,8887 2917,8887 3127,9097 3127,9330.93 P903_12.B3@3178.85,9382.78
VGA12_A4: P12.28 P903_12.D3 | length 1405.7
  Ground Plane Bottom w10: P12.28@2073,9153 2996,9153 3127,9284 3127,9508.09 P903_12.D3@3178.85,9559.94
VGA12_B0: P12.22 P902_12.D1 | length 509.3
  Bottom Layer w10: P12.22@1473,9153 1473,9312.94 P902_12.D1@1720,9559.94
VGA12_B1: P12.25 P902_12.B3 | length 289.4
  Top Layer w10: P12.25@1773,9153 1869,9249 1869,9334.93 P902_12.B3@1916.85,9382.78
VGA12_B2: P12.23 P902_12.D2 | length 529.1
  Bottom Layer w10: P12.23@1573,9153 1690,9270 1725,9270 1773,9318 1773,9514.52 P902_12.D2@1818.43,9559.94
VGA12_B3: P12.10 P902_12.B2 | length 390
  Top Layer w10: P12.10@1673,9053 1725,9105 1725,9205 1773,9253 1773,9337.35 P902_12.B2@1818.43,9382.78
VGA12_B4: P12.24 P902_12.D3 | length 541.3
  Bottom Layer w10: P12.24@1673,9153 1772,9252 1829,9252 1869,9292 1869,9512.09 P902_12.D3@1916.85,9559.94
VGA34_A0: P34.3 P903_34.D1 | length 1642.2
  Ground Plane Bottom w10: P903_34.D1@99.06,7995 194.06,7900 412,7900 757,7555 757,7156 P34.3@1042,6871
VGA34_A1: P34.15 P903_34.B2 | length 1538.4
  Ground Plane Top w10: P903_34.B2@276.22,8093.43 276.22,8075.15 312.62,8038.74 581.26,8038.74 1142,7478 P34.15@1142,7071
VGA34_A2: P34.2 P903_34.D2 | length 1687.9
  Ground Plane Bottom w10: P903_34.D2@99.06,8093.43 148.48,8044 447,8044 885,7606 885,7128 P34.2@1042,6971
VGA34_A3: P34.16 P903_34.B3 | length 1896.8
  Ground Plane Top w10: P903_34.B3@276.22,8191.85 328.07,8140 635,8140 1308,7467 1308,7137 P34.16@1142,6971
VGA34_A4: P34.1 P903_34.D3 | length 1727.6
  Ground Plane Bottom w10: P903_34.D3@99.06,8191.85 142.87,8148.04 ; 142.94,8148.11 511.89,8148.11 1042,7618 P34.1@1042,7071
VGA34_B0: P34.20 P902_34.D1 | length 1110
  Bottom Layer w10: P902_34.D1@99.06,6733 209.06,6623 1090,6623 P34.20@1142,6571
VGA34_B1: P34.4 P902_34.B3 | length 831.6
  Top Layer w10: P902_34.B3@276.22,6929.85 326.07,6880 933,6880 P34.4@1042,6771
VGA34_B2: P34.19 P902_34.D2 | length 1109.4
  Bottom Layer w10: P902_34.D2@99.06,6831.43 151.48,6779 936,6779 988.53,6726.47 1086.53,6726.47 P34.19@1142,6671
VGA34_B3: P34.5 P902_34.B2 | length 832.2
  Top Layer w10: P902_34.B2@276.22,6831.43 327.65,6780 933,6780 P34.5@1042,6671
VGA34_B4: P34.18 P902_34.D3 | length 1108.7
  Bottom Layer w10: P902_34.D3@99.06,6929.85 147.91,6881 934,6881 995,6820 1093,6820 P34.18@1142,6771
VGA56_A0: P56.3 P903_56.D1 | length 1122.6
  Ground Plane Bottom w10: P903_56.D1@99.06,3353 250.06,3202 422,3202 934,2690 P56.3@934,2677
VGA56_A1: P56.15 P903_56.B2 | length 1053.7
  Ground Plane Top w10: P903_56.B2@276.22,3451.43 322.65,3405 605,3405 1034,2976 P56.15@1034,2877
VGA56_A2: P56.2 P903_56.D2 | length 1210.4
  Ground Plane Bottom w10: P903_56.D2@99.06,3451.43 145.48,3405 470,3405 811,3064 811,2900 P56.2@934,2777
VGA56_A3: P56.16 P903_56.B3 | length 1420.6
  Ground Plane Top w10: P903_56.B3@276.22,3549.85 323.07,3503 746,3503 1138,3111 1138,2881 P56.16@1034,2777
VGA56_A4: P56.1 P903_56.D3 | length 1250.7
  Ground Plane Bottom w10: P903_56.D3@99.06,3549.85 145.91,3503 542,3503 934,3111 P56.1@934,2877
VGA56_B0: P56.21 P902_56.D1 | length 1055.9
  Bottom Layer w10: P902_56.D1@99.06,2091 152.06,2038 694,2038 885,2229 986,2229 P56.21@1034,2277
VGA56_B1: P56.4 P902_56.B3 | length 777.5
  Top Layer w10: P902_56.B3@276.22,2287.85 328.37,2340 666,2340 903,2577 P56.4@934,2577
VGA56_B2: P56.20 P902_56.D2 | length 1056.1
  Bottom Layer w10: P902_56.D2@99.06,2189.43 151.48,2137 704.94,2137 900.42,2332.47 989.47,2332.47 P56.20@1034,2377
VGA56_B3: P56.5 P902_56.B2 | length 776.9
  Top Layer w10: P902_56.B2@276.22,2189.43 328.79,2242 699,2242 P56.5@934,2477
VGA56_B4: P56.19 P902_56.D3 | length 1051.3
  Bottom Layer w10: P902_56.D3@99.06,2287.85 144.91,2242 699,2242 884,2427 984,2427 P56.19@1034,2477
VGA78_A0: P78.2 P903_78.D1 | length 1620.3
  Ground Plane Bottom w10: P903_78.D1@1475.83,99.06 1940.77,564 2734,564 2827,657 P78.2@2827,695
VGA78_A1: P78.16 P903_78.B2 | length 1864.7
  Ground Plane Top w10: P903_78.B2@1377.4,276.22 1427,325.82 1427,522 1803,898 2724,898 P78.16@2827,795
VGA78_A2: P78.1 P903_78.D2 | length 1761.8
  Ground Plane Bottom w10: P903_78.D2@1377.4,99.06 1428,149.66 1428,432 1691,695 P78.1@2727,695
VGA78_A3: P78.17 P903_78.B3 | length 2125.6
  Ground Plane Top w10: P903_78.B3@1278.98,276.22 1330,327.24 1330,541 1750,961 2761,961 P78.17@2927,795
VGA78_A4: P78.15 P903_78.D3 | length 1920.8
  Ground Plane Bottom w10: P903_78.D3@1278.98,99.06 1329,149.08 1329,464 1660,795 P78.15@2727,795
VGA78_B0: P78.5 P902_78.D1 | length 758.1
  Top Layer w10: P902_78.D1@2737.83,99.06 3127,488.23 P78.5@3127,696
VGA78_B1: P78.19 P902_78.B3 | length 874
  Bottom Layer w10: P902_78.B3@2540.98,276.22 2593,328.24 2593,362 2787,556 2971,556 3076,661 3076,752 3119,795 P78.19@3127,795
VGA78_B2: P78.4 P902_78.D2 | length 766.3
  Top Layer w10: P902_78.D2@2639.4,99.06 2690,149.66 2690,374 3012,696 P78.4@3027,696
VGA78_B3: P78.20 P902_78.B2 | length 951.4
  Bottom Layer w10: P902_78.B2@2639.4,276.22 2690,326.82 2690,374 2764,448 3087,448 3175,536 3175,743 P78.20@3227,795
VGA78_B4: P78.3 P902_78.D3 | length 756.4
  Top Layer w10: P902_78.D3@2540.98,99.06 2593,151.08 2593,362 2926,695 P78.3@2927,695
VGA_ENA12: P12.7 P901_12.A8 | length 611.2
  Top Layer w10: P901_12.A8@914.98,9323.72 922.76,9323.72 982.48,9264 1162,9264 1223,9203 1223,9133 1254,9102 1294,9102 1343,9053 P12.7@1373,9053
VGA_ENA34: P34.9 P901_34.A8 | length 848.8
  Top Layer w10: P901_34.A8@335.28,5927.98 698.98,5927.98 P34.9@1042,6271
VGA_ENA56: P56.9 P901_56.A8 | length 1039.4
  Top Layer w10: P901_56.A8@335.28,1285.98 481.3,1432 482,1432 516,1466 516,1659 P56.9@934,2077
VGA_ENA78: P78.8 P901_78.A8 | length 408.7
  Top Layer w10: P78.8@3427,696 3427,451.13 P901_78.A8@3542.85,335.28
VGA_ENB12: P12.8 P901_12.A9 | length 612.7
  Top Layer w10: P901_12.A9@1013.4,9323.72 1021.82,9323.72 1059.54,9286 1240,9286 1324,9202 1324,9132 1354,9102 1395,9102 1444,9053 P12.8@1473,9053
VGA_ENB34: P34.8 P901_34.A9 | length 849.5
  Top Layer w10: P901_34.A9@335.28,6026.4 697.4,6026.4 P34.8@1042,6371
VGA_ENB56: P56.8 P901_56.A9 | length 1040.6
  Top Layer w10: P901_56.A9@335.28,1384.4 430.39,1479.52 430.39,1673.39 P56.8@934,2177
VGA_ENB78: P78.7 P901_78.A9 | length 409.4
  Top Layer w10: P78.7@3327,696 3327,452.7 P901_78.A9@3444.42,335.28
pads on no net: P901_12.A3 P901_12.A4 P901_12.B4 P901_12.B5 P901_12.B6 P901_12.B7 P901_12.C1 P901_12.C2 P901_12.C3 P901_12.C4 P901_12.C5 P901_12.C6 P901_12.C7 P901_12.C8 P901_12.C9 P901_12.C10 P901_12.D1 P901_12.D2 P901_12.D3 P901_12.D4 P901_12.D5 P901_12.D6 P901_12.D7 P901_12.D8 P901_12.D9 P901_12.D10 P901_34.A3 P901_34.A4 P901_34.B4 P901_34.B5 P901_34.B6 P901_34.B7 P901_34.C1 P901_34.C2 P901_34.C3 P901_34.C4 P901_34.C5 P901_34.C6 P901_34.C7 P901_34.C8 P901_34.C9 P901_34.C10 P901_34.D1 P901_34.D2 P901_34.D3 P901_34.D4 P901_34.D5 P901_34.D6 P901_34.D7 P901_34.D8 P901_34.D9 P901_34.D10 P901_56.A3 P901_56.A4 P901_56.B4 P901_56.B5 P901_56.B6 P901_56.B7 P901_56.C1 P901_56.C2 P901_56.C3 P901_56.C4 P901_56.C5 P901_56.C6 P901_56.C7 P901_56.C8 P901_56.C9 P901_56.C10 P901_56.D1 P901_56.D2 P901_56.D3 P901_56.D4 P901_56.D5 P901_56.D6 P901_56.D7 P901_56.D8 P901_56.D9 P901_56.D10 P901_78.A3 P901_78.A4 P901_78.B4 P901_78.B5 P901_78.B6 P901_78.B7 P901_78.C1 P901_78.C2 P901_78.C3 P901_78.C4 P901_78.C5 P901_78.C6 P901_78.C7 P901_78.C8 P901_78.C9 P901_78.C10 P901_78.D1 P901_78.D2 P901_78.D3 P901_78.D4 P901_78.D5 P901_78.D6 P901_78.D7 P901_78.D8 P901_78.D9 P901_78.D10 P902_12.A1 P902_12.A2 P902_12.A3 P902_12.A4 P902_12.A5 P902_12.A6 P902_12.A7 P902_12.A8 P902_12.A9 P902_12.A10 P902_12.B1 P902_12.B4 P902_12.B5 P902_12.B6 P902_12.B7 P902_12.B8 P902_12.B9 P902_12.B10 P902_12.C1 P902_12.C2 P902_12.C3 P902_12.C4 P902_12.C5 P902_12.C6 P902_12.C7 P902_12.C8 P902_12.C9 P902_12.D4 P902_12.D5 P902_12.D6 P902_12.D7 P902_12.D8 P902_12.D9 P902_12.D10 P902_34.A1 P902_34.A2 P902_34.A3 P902_34.A4 P902_34.A5 P902_34.A6 P902_34.A7 P902_34.A8 P902_34.A9 P902_34.A10 P902_34.B1 P902_34.B4 P902_34.B5 P902_34.B6 P902_34.B7 P902_34.B8 P902_34.B9 P902_34.B10 P902_34.C1 P902_34.C2 P902_34.C3 P902_34.C4 P902_34.C5 P902_34.C6 P902_34.C7 P902_34.C8 P902_34.C9 P902_34.D4 P902_34.D5 P902_34.D6 P902_34.D7 P902_34.D8 P902_34.D9 P902_34.D10 P902_56.A1 P902_56.A2 P902_56.A3 P902_56.A4 P902_56.A5 P902_56.A6 P902_56.A7 P902_56.A8 P902_56.A9 P902_56.A10 P902_56.B1 P902_56.B4 P902_56.B5 P902_56.B6 P902_56.B7 P902_56.B8 P902_56.B9 P902_56.B10 P902_56.C1 P902_56.C2 P902_56.C3 P902_56.C4 P902_56.C5 P902_56.C6 P902_56.C7 P902_56.C8 P902_56.C9 P902_56.D4 P902_56.D5 P902_56.D6 P902_56.D7 P902_56.D8 P902_56.D9 P902_56.D10 P902_78.A1 P902_78.A2 P902_78.A3 P902_78.A4 P902_78.A5 P902_78.A6 P902_78.A7 P902_78.A8 P902_78.A9 P902_78.A10 P902_78.B1 P902_78.B4 P902_78.B5 P902_78.B6 P902_78.B7 P902_78.B8 P902_78.B9 P902_78.B10 P902_78.C1 P902_78.C2 P902_78.C3 P902_78.C4 P902_78.C5 P902_78.C6 P902_78.C7 P902_78.C8 P902_78.C9 P902_78.D4 P902_78.D5 P902_78.D6 P902_78.D7 P902_78.D8 P902_78.D9 P902_78.D10 P903_12.A1 P903_12.B1 P903_12.B4 P903_12.B6 P903_12.B7 P903_12.B8 P903_12.B9 P903_12.B10 P903_12.C9 P903_12.D4 P903_12.D5 P903_12.D6 P903_12.D7 P903_12.D8 P903_12.D9 P903_34.A1 P903_34.B1 P903_34.B4 P903_34.B6 P903_34.B7 P903_34.B8 P903_34.B9 P903_34.B10 P903_34.C9 P903_34.D4 P903_34.D5 P903_34.D6 P903_34.D7 P903_34.D8 P903_34.D9 P903_56.A1 P903_56.B1 P903_56.B4 P903_56.B6 P903_56.B7 P903_56.B8 P903_56.B9 P903_56.B10 P903_56.C9 P903_56.D4 P903_56.D5 P903_56.D6 P903_56.D7 P903_56.D8 P903_56.D9 P903_78.A1 P903_78.B1 P903_78.B4 P903_78.B6 P903_78.B7 P903_78.B8 P903_78.B9 P903_78.B10 P903_78.C9 P903_78.D4 P903_78.D5 P903_78.D6 P903_78.D7 P903_78.D8 P903_78.D9 VHDC1.A15 VHDC1.A16 VHDC1.A17 VHDC1.A18 VHDC1.A19 VHDC1.B15 VHDC1.B16 VHDC1.B17 VHDC1.B18 VHDC1.B19 VHDC2.A15 VHDC2.A16 VHDC2.A17 VHDC2.A18 VHDC2.A19 VHDC2.B15 VHDC2.B16 VHDC2.B17 VHDC2.B18 VHDC2.B19

## Polygon pours and split planes (outlines as drawn)
GND on Ground Plane Top "Ground Plane Bot-GND" (solid, remove dead copper, pour order 11): 10,10 4397,10 4397,9649 10,9649
GND on Ground Plane Bottom "Ground Plane Bot-GND" (solid, remove dead copper, pour order 13): 10,10 4397,10 4397,9649 10,9649
GND on Top Layer "Top Layer-GND" (solid, remove dead copper, pour order 4): 10,10 10,9649 4397,9649 4397,10
GND on Bottom Layer "Top Layer-GND" (solid, remove dead copper, pour order 6): 10,10 4397,10 4397,9649 10,9649

## Silkscreen, mask and mechanical layers (free items; w line width, h text height)
Top Overlay:
  text "1x8 Phased Array MQP" at 1559,5477 h60
  text "Tayyar Rzayev" at 1566,5336 h60
  text "01/05/2012" at 1566,5190 h60
Mechanical 1:
  lines w10: 0,0 0,9600 0,9659 4407,9659 4407,7992 4020,7992 4020,6777 4407,6777 4407,5663 4024,5663 4024,4393 4407,4393 4407,3280 4020,3280 4020,1911 4407,1911 4407,22 4407,0 4374,0 0,0

## Text inside footprints (layer, text, board x,y; h text height)
P12: Top Overlay "28" at 2135,9117 h50; Top Overlay "14" at 2140,9026 h50; Top Overlay "1" at 667,9045 h50; Top Overlay "15" at 616,9187 h50
P34: Top Overlay "28" at 1127,5687 h50 r270; Top Overlay "14" at 1013,5695 h50 r270; Top Overlay "1" at 1010,7180 h50 r270; Top Overlay "15" at 1113,7220 h50 r270
P56: Top Overlay "28" at 1104,1470 h50 r270; Top Overlay "14" at 921,1450 h50 r270; Top Overlay "1" at 885,3022 h50 r270; Top Overlay "15" at 974,3026 h50 r270